# Altium PCB Camera-Sensor-Project.PcbDoc (part 2 of 2)
Units mm, origin at the board's own origin, x right, y up, seen from the top; angles counter-clockwise.
Board outline 82.2 x 56.7 mm, 8 copper layers (Top Layer, Layer 1, Layer 2, Layer 3, Layer 11, Layer 12, Layer 13, Layer 14), stack 1.544 mm thick; 45 components, 37 nets, 231 pads, 10 vias.
Unrouted connection lines stored in the file: 172.
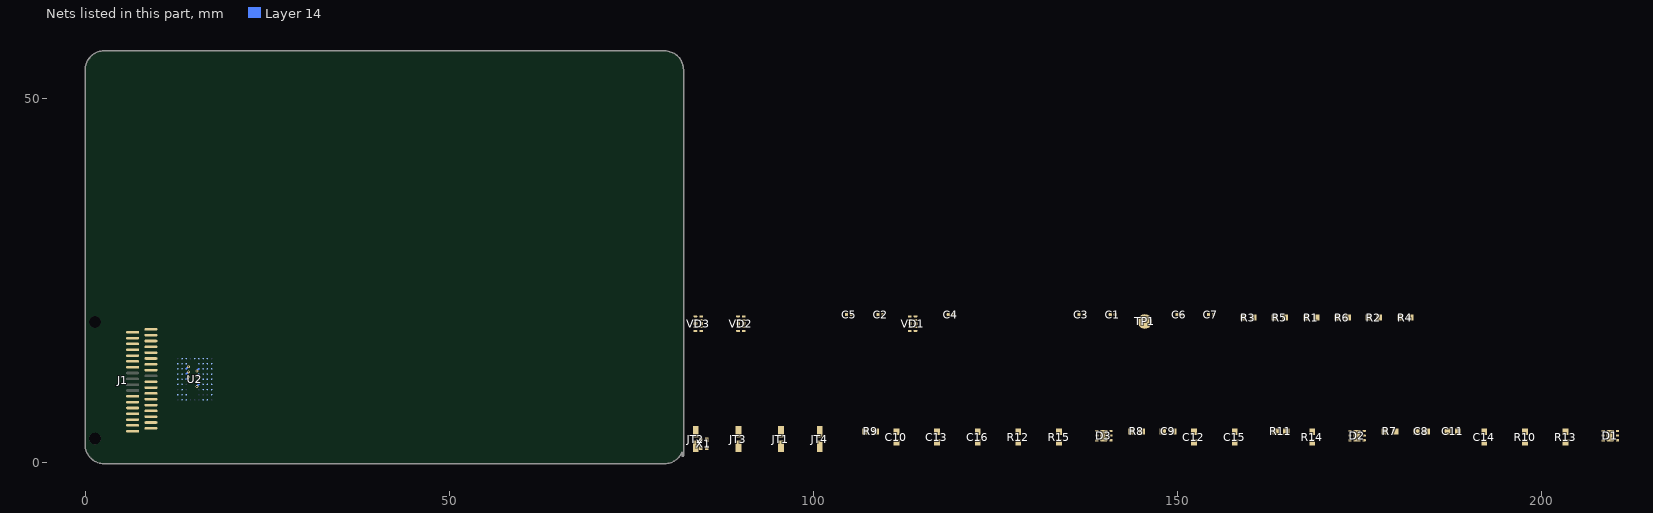
[diagram p2: the nets of this part, all layers, seen from the top]

## Footprints (in the part's own frame and the unit in brackets; to place one, negate y for a bottom-side part, rotate by r counter-clockwise, add the part's x,y. Pads: shape width x height; smd on the part's side, far side on the other; paste and mask are expansions set on the pad) (continued)
DFN1.6X1.2 [mm]
  rect 0.5x0.6 smd: 1(-0.4,0.55) 2(-0.4,-0.55) 3(0.4,-0.55) 4(0.4,0.55)
  silkscreen extent -1.4,-1.07 0.87,1.09, body extent -0.6,-0.8 0.6,0.8, height 0.7
R0603 [mm]
  rect 0.85x0.8 smd: 1(-0.725,0) 2(0.725,0)
  silkscreen extent -1.4,-0.65 1.4,0.65, body extent -0.8,-0.4 0.8,0.4, height 0.45
TP [mm]
  round 2 smd: 1(0,0)
"UDFN10_1.0x2.5x0.55Body; Recommended: onsemi" [mm] "CASE 517BB?01; ISSUE O"
  rrect50% 0.5x0.25 smd: 1(-0.4,1) 2(-0.4,0.5) 4(-0.4,-0.5) 5(-0.4,-1) 6(0.4,-1) 7(0.4,-0.5) 9(0.4,0.5) 10(0.4,1)
  rrect50% 0.5x0.45 smd: 3(-0.4,0) 8(0.4,0)
  silkscreen extent -0.62,-1.3 0.5,1.42, body extent -0.5,-1.25 0.5,1.25, height 0.55
"WSON6_2.1x2.1x0.8Body; Recommended: Texas Instruments" [mm]
  rrect50% 0.45x0.3 smd: 1(-0.975,0.65) 2(-0.975,0) 3(-0.975,-0.65) 4(0.975,-0.65) 5(0.975,0) 6(0.975,0.65)
  rrect20% 1x1.6 smd: EPAD(0,0)
  silkscreen extent -1.17,-1.05 1.05,1.17, body extent -1,-1 1,1, height 0.8

## Part data
C1 C2 C3 C4 C5 C6 C7: library part VCH_CMP_CAP_0000489-24, "N/A", 2) Package=0201, 3) Tolerance [%]=10%, 3) Voltage=16V, 4) Dielectric=X7R, Manufacturer=Murata, 1) Ta max=125°C, 1) Ta min=-55°C, 2) Height max=330µm, 2) Length max=630µm, 2) Width max=330µm, 4) Note="Derating1。 Temperature characteristic : Range of capacitance change rate is specified with 50% of rated voltage.", 5) Application="General Purpose", Part Number=GRM033Z71C104KE14, Значение=100н
C8 C9 C10: library part "Cap 1uF 10% 16V_Samsung", Case=0603, Manufacture="Samsung Electro-Mechanics", Part Number=CL10B105KO8NNNC, Tolerance=10%, Voltage=16V, HelpURL=https://www.digikey.com/product-detail/en/samsung-electro-mechanics/CL10B105KO8NNNC/1276-1019-1-ND/3889105, Model=CL10B105KO8NNNC
C11 C12 C13: library part "Cap 100nF 20% 25V", Case=0603, Manufacture="AVX Corporation", Part Number=06033G104ZAT2A, Tolerance="+80% -20%", Voltage=25V, HelpURL=https://ru.farnell.com/avx/06033g104zat2a/cap-0-1-f-25v-y5v-0603/dp/317287?ost=317-287, Model=06033G104ZAT2A
C14 C15 C16: library part "Cap 2.2uF 10% 6.3V", Case=0603, Manufacture="AVX Corporation", Part Number=06036D225KAT2A, Tolerance=10%, Voltage=6.3V, HelpURL=https://www.digikey.com/products/en?keywords=478-1252-2-ND, Model=06036D225KAT2A
D1 D2 D3: library part VCH_CMP_IC_0000046-20, "IC REG LIN POS ADJ 500MA 6WSON", 2) Package=WSON6, Manufacturer="Texas Instruments", 1) Rθja max=80.3°C, 1) Tj max=125°C, 1) Tj min=-40°C, 2) Height max=800µm, 2) Length max=2.1mm, 2) Width max=2.1mm, 3) Ignd @Iout max @25°C=31µA, 3) Iout max @25°C=500mA, 3) Vdo @Iout max @25°C=880mV, 3) Vin max=6V, 3) Vin min=1.5V, 3) Vn [V]=53µV, 3) Vout max=5.5V, 3) Vout min=550mV, 4) Number of Regulators=1, ComponentLink1Description="URL Manufacturer", ComponentLink1URL=https://www.ti.com/product/TPS745, Part Number=TPS74501PDRV
J1: "CONN MINI SAS RCP 36P SLD RA SMD", Case=SMD, Manufacture="TE Connectivity", ComponentLink1Description=Datasheet, Model=1761987-2
JT1 JT2 JT3 JT4: Case=SOT-23, Manufacture=Bourns, HelpURL=https://www.compel.ru/item-pdf/3da40dc7a4ab42364bbe129f36a2cb8d/ps/bourns~7914.pdf, Model=BAV74
R1 R5 R6: library part "Res 0R OHM 0603", Case=0603, Manufacture="Panasonic Electronic Components", Part Number=P0.0GDKR-ND, Tolerance=5%, HelpURL=https://www.digikey.com/en/products/detail/panasonic-electronic-components/ERJ-3GEY0R00V/577612, Model=ERJ-3GEY0R00V
R2: library part "Res 0R NP 1% 0603", Case=0603, Tolerance=1%
R3 R4 R7 R8 R9 R13 R14 R15: library part "Res 10k 1% 0603", Case=0603, Manufacture="Panasonic Electronic Components", Part Number=P10.0KHTR-ND, Tolerance=1%, HelpURL=https://www.digikey.com/en/products/detail/ERJ-3EKF1002V/P10.0KHCT-ND/198102, Model=ERJ-3EKF1002V
R10: library part "Res 11k8 1% 0603", Case=0603, Manufacture=Yageo, Tolerance=1%, HelpURL=https://www.electronshik.ru/item/YAG/RC0603FR-0711K8L, Model=RC0603FR-0711K8L
R11: library part "Res 22k6 1% 0603", Case=0603, Manufacture=Yageo, Tolerance=1%, HelpURL=https://www.electronshik.ru/item/YAG/RC0603FR-0722K6L, Model=RC0603FR-0722K6L
R12: library part "Res 41k2 1% 0603", Case=0603, Manufacture=Yageo, Tolerance=1%, HelpURL=https://www.electronshik.ru/item/YAG/RC0603FR-0741K2L, Model=RC0603FR-0741K2L
U2: "IMAGE SENSOR 4MP 1/3 CIS SO81-BGA", Manufacture=OMNIVISION, ComponentLink1Description=Datasheet, ComponentLink1URL=https://www.st.com/resource/en/datasheet/stm32f407vg.pdf, Model=OV4689
VD1 VD2 VD3: library part VCH_CMP_PROT_0000010-15, 5) Package=UDFN10, Manufacturer=onsemi, 1) Tj max=125°C, 1) Tj min=-55°C, 2) Height max=550µm, 2) Length max=1mm, 2) Width max=2.5mm, 3) C max @25°=0.37pF, 3) IEC-61000-4-2 Contact=8kV, 3) Ipp @Vcl @25°=16A, 3) Ir @Vr @25°=1µA, 3) It @Vbr @25°=1mA, 3) Vbr min @25°=4V, 3) Vcl max @25°=11.4V, 3) Vr min @25°=3.3V, 4) Note="Flow−Through Style", 5) Mounting=SMT, 6) Bidirectional Channels=0, 6) Unidirectional Channels=4, 7) Application="USB 3.0/3.1, eSATA, HDMI 1.3/1.4/2.0, DisplayPort", ComponentLink1Description="URL Manufacturer", ComponentLink1URL=https://www.onsemi.com/products/discrete-power-modules/esd-protection-diodes/esd8104, Part Number=ESD8104MUTAG
X1: "XTAL OSC XO 24.0000MHZ CMOS SMD", Case=DFN1.6X1.2, Manufacture=ECS, ComponentLink1Description=Datasheet, Model=ECS-1612MV-240-CN-TR

## Via types
v1: diameter 0.4, hole 0.2, Top Layer to Layer 14, tented both sides, 10 vias

## Nets (pads, with @x,y where several pads share a name; then routed paths per layer and width w, separated by ;. In a path a pad name is that pad's centre, name@x,y a point inside that pad or via, vN(x,y) a via of type N, cw(c..) or ccw(c..) an arc to the next point about the centre after c; other vN are vias at no path point)
AGND: C4.1 C6.1 C7.1 JT3.2 U2.B1 U2.C8 U2.G1
AVDD: C4.2 C13.2 C16.2 D3.1 JT1.1 R12.2 R15.1 U2.A3 U2.A8 U2.B4 U2.C1 U2.H1
DGND: C1.1 C2.1 C3.1 C8.1 C9.1 C10.1 C11.1 C12.1 C13.1 C14.1 C15.1 C16.1 D1.3 D1.EPAD D2.3 D2.EPAD D3.3 D3.EPAD J1.A1 J1.A4 J1.A7 J1.A12 J1.A15 J1.A18 J1.B1 J1.B4 J1.B7 J1.B12 J1.B15 J1.B18 JT2.2 JT3.1 R7.1 R8.1 R9.1 U2.B2 U2.B3 U2.B6 U2.C9 U2.F1 U2.G9 U2.H6 X1.2
DOVDD: C1.2 C11.2 C14.2 D1.1 R10.2 R13.1 U2.A4 U2.F6 U2.G7 | length 0.4
  Layer 14 w0.173: v1(15.24,10.5) U2.F6@15.53,10.79
DVDD: C3.2 C12.2 C15.2 D2.1 JT4.2 R2.2 R5.1 R6.1 R11.2 R14.1 U2.A2 U2.A6 U2.B8 U2.B9 U2.C4 U2.E1 U2.H9 U2.J6 X1.4 | length 0.4
  Layer 14 w0.173: U2.C4@13.79,12.21 v1(14.08,12.5)
EGND: C5.1 JT2.1 U2.G5 U2.H3 U2.J2
EVDD: C5.2 JT4.1 U2.G3 U2.G4
GND: R3.1 R4.1 VD1.3 VD1.8 VD2.3 VD2.8 VD3.3 VD3.8
MIPI_CSI_CLK_10_n: J1.A3 U2.J4 VD3.2 VD3.9
MIPI_CSI_CLK_10_p: J1.A2 U2.H4 VD3.1 VD3.10
MIPI_CSI_D0_10_n: J1.B3 U2.F3 VD1.2 VD1.9 | length 0.4
  Layer 14 w0.2: v1(15.24,12.63) U2.F3@15.53,12.92
MIPI_CSI_D0_10_p: J1.B2 U2.F2 VD1.1 VD1.10
MIPI_CSI_D1_10_n: J1.B6 U2.F5 VD1.5 VD1.6 | length 0.4
  Layer 14 w0.2: v1(15.24,11.21) U2.F5@15.53,11.5
MIPI_CSI_D1_10_p: J1.B5 U2.F4 VD1.4 VD1.7 | length 0.4
  Layer 14 w0.2: v1(15.24,11.92) U2.F4@15.53,12.21
MIPI_CSI_D2_10_n: J1.B14 U2.H2 VD2.2 VD2.9
MIPI_CSI_D2_10_p: J1.B13 U2.G2 VD2.1 VD2.10
MIPI_CSI_D3_10_n: J1.B17 U2.H5 VD2.5 VD2.6
MIPI_CSI_D3_10_p: J1.B16 U2.J5 VD2.4 VD2.7
NetC6_2: C6.2 U2.C3 | length 0.4
  Layer 14 w0.173: U2.C3@13.79,12.92 v1(14.08,13.21)
NetC7_2: C7.2 U2.C2
NetD1_2: D1.2 R7.2 R10.1
NetD2_2: D2.2 R8.2 R11.1
NetD3_2: D3.2 R9.2 R12.1
NetR1_2: R1.2 R2.1 R3.2 X1.1
NetR5_2: R5.2 U2.B5
NetR6_2: R6.2 U2.C5 | length 0.4
  Layer 14 w0.173: U2.C5@13.79,11.5 v1(14.08,11.79)
NetTP1_1: TP1.1 U2.A5
NetU2_J7: U2.J7 X1.3
PG_AVDD_10: D1.4 D3.5 R15.2
PG_DOVDD_10: D1.5 D2.4 R13.2
PG_DVDD_10: D2.5 R14.2
PVDD: C2.2 JT1.2 U2.B7 U2.J3
PWR_EN_10: D3.4 J1.B8 R1.1
SID_10: R4.2 U2.J8
SIOC_10: J1.B10 U2.G6 VD3.4 VD3.7
SIOD_10: J1.B11 U2.H7 VD3.5 VD3.6
VIN: C8.2 C9.2 C10.2 D1.6 D2.6 D3.6 J1.A5 J1.A6 J1.A13 J1.A14 J1.A16 J1.A17
pads on no net: J1.37 J1.38 J1.A8 J1.A9 J1.A10 J1.A11 J1.B9 U2.A1 U2.A7 U2.A9 U2.C6 U2.C7 U2.D1 U2.D9 U2.E9 U2.F7 U2.F8 U2.F9 U2.G8 U2.H8 U2.J1 U2.J9
copper on no net: | length 1.2
  Layer 14 w0.173: 13.79,10.08 v1(14.08,10.37) ; 13.79,10.79 v1(14.08,11.08) ; v1(15.24,9.79) 15.53,10.08

## Other copper
Layer 14:
  region: 18.075,3.825
  region: 18.075,3.825

## Silkscreen, mask and mechanical layers (free items; w line width, h text height)
RFU:
  lines w0.2: 22.25,56 2.5,56 ccw(c2.5,53.5) 0,53.5 0,2.5 ccw(c2.5,2.5) 2.5,0 79.5,0 ccw(c79.5,2.5) 82,2.5 82,53.5 ccw(c79.5,53.5) 79.5,56 36.25,56 22.25,56 ; 22.25,56 22.25,56